# Altium PCB PCB_Reflow_Plate.PcbDoc (part 2 of 2)
Units mil, origin at the board's own origin, x right, y up, seen from the top; angles counter-clockwise.
Board outline 3822.83 x 3712.6 mil, 2 copper layers (Top Layer, Bottom Layer); 42 components, 17 nets, 157 pads, 47 vias.
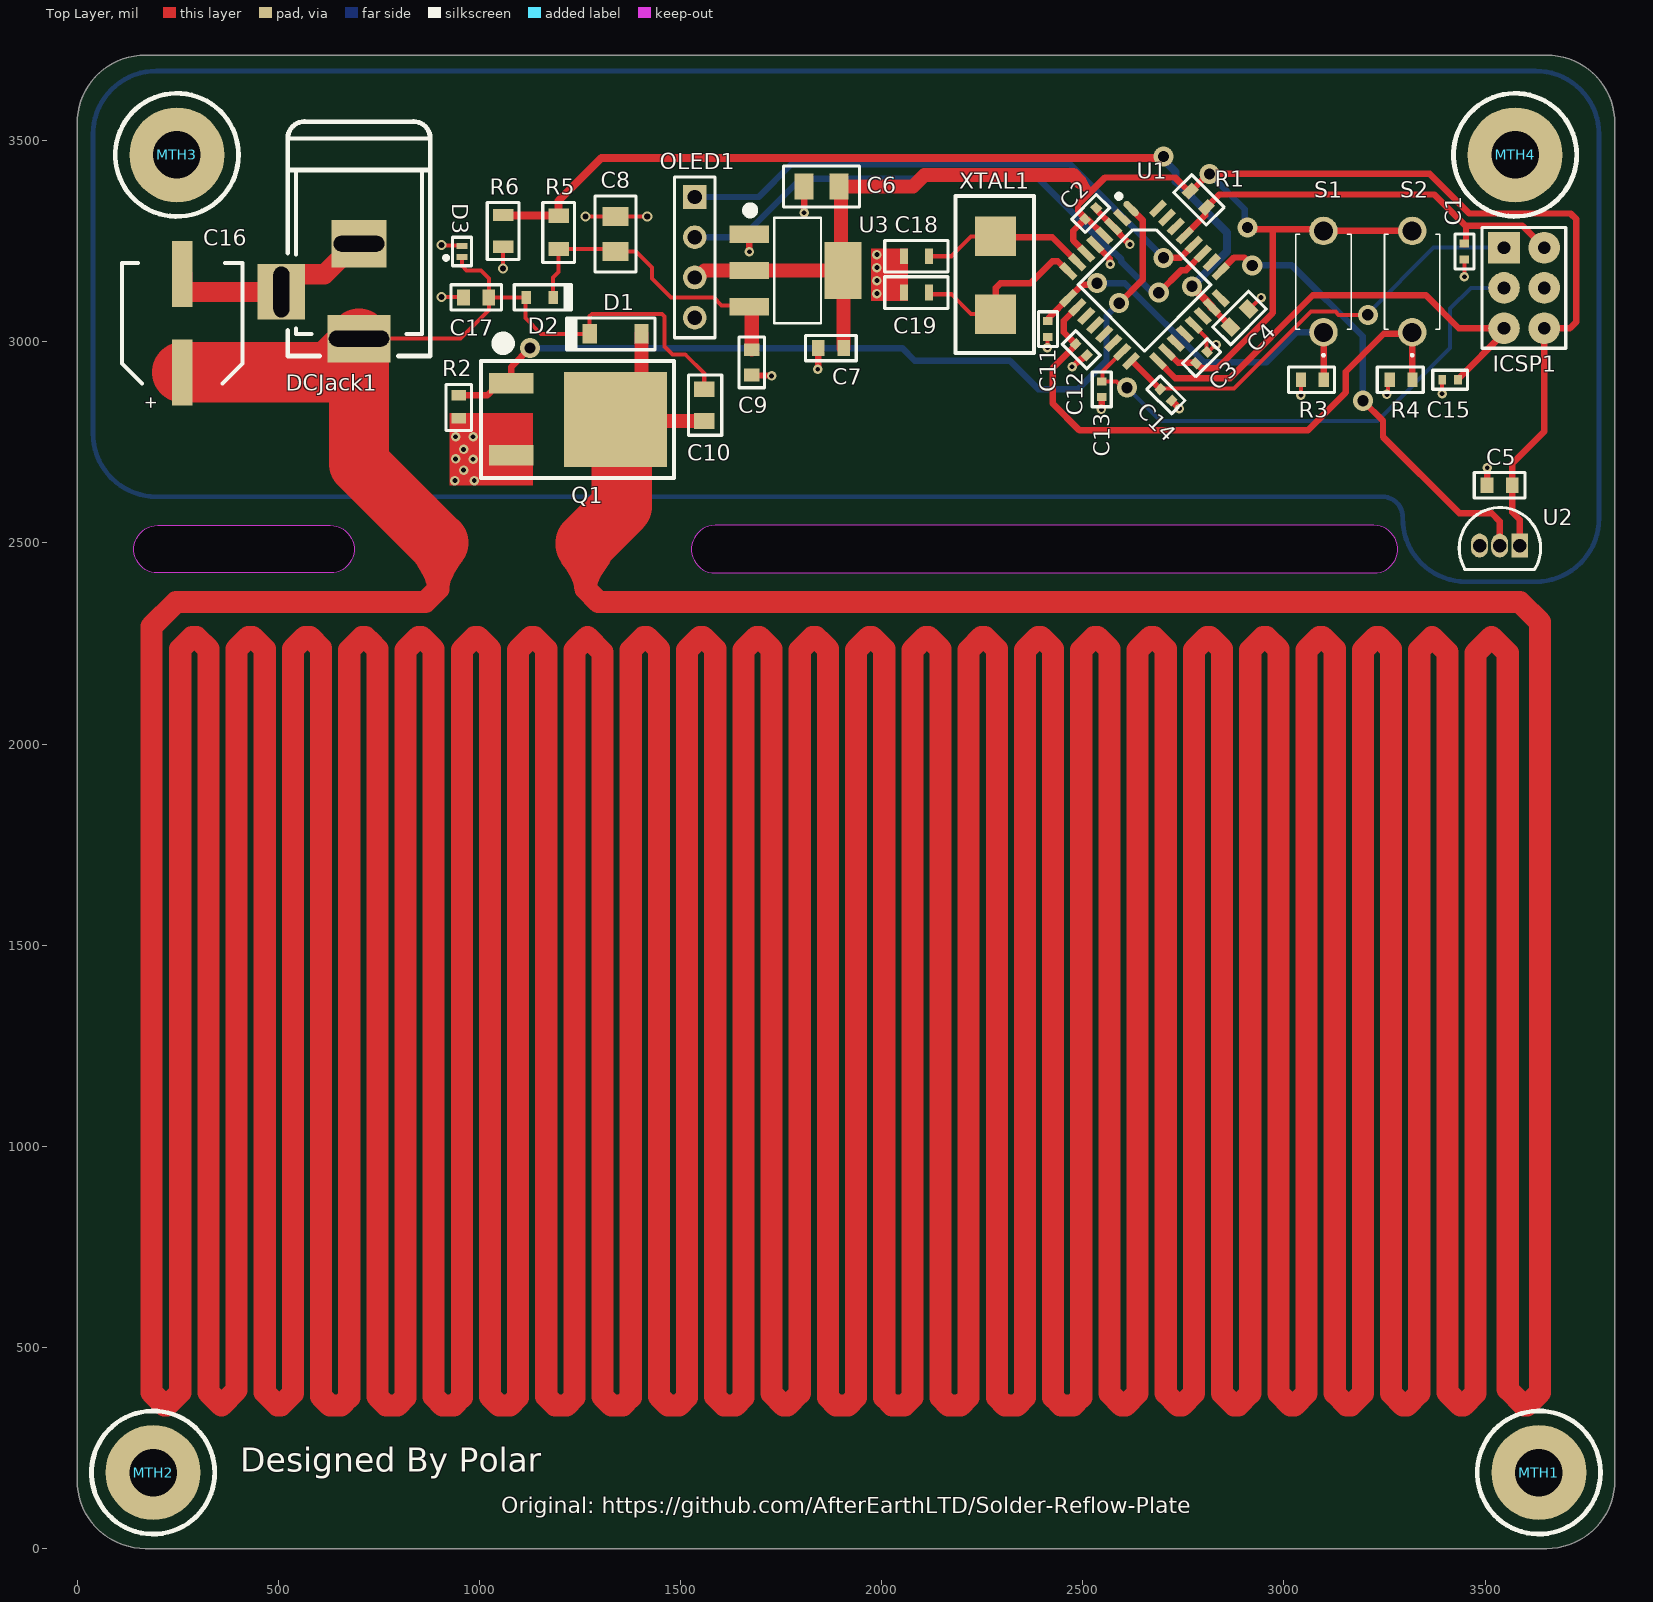
[diagram p0: Top Layer view]

## Via types
v1: diameter 23.62, hole 11.81, Top Layer to Bottom Layer, tented both sides, 29 vias
v2: diameter 50, hole 28, Top Layer to Bottom Layer, tented both sides, 13 vias
v3: diameter 25, hole 15, Top Layer to Bottom Layer, tented both sides, 5 vias

## Nets (pads, with @x,y where several pads share a name; then routed paths per layer and width w, separated by ;. In a path a pad name is that pad's centre, name@x,y a point inside that pad or via, vN(x,y) a via of type N, cw(c..) or ccw(c..) an arc to the next point about the centre after c; other vN are vias at no path point) (continued)
Mos_Drain: (continued)
  Top Layer w55: 897.64,2500 897.64,2385.6 865.42,2353.39 246.38,2353.39 185.04,2292.05 185.04,2245.95 185.04,388.17 217.26,355.95 224.16,355.95 256.38,388.17 256.38,2235.95 286.38,2265.95 296.38,2265.95 326.38,2235.95 326.38,388.17 358.6,355.95 396.38,393.73 396.38,2235.95 426.38,2265.95 436.38,2265.95 466.38,2235.95 466.38,388.17 498.6,355.95 506.38,355.95 536.38,385.95 536.38,2235.95 566.38,2265.95 578.6,2265.95 606.38,2238.17 606.38,378.17 628.6,355.95 656.38,355.95 676.38,375.95 676.38,2233.73 708.6,2265.95 716.38,2265.95 730.27,2252.06 746.38,2235.95 746.38,378.17 768.6,355.95 796.38,355.95 816.38,375.95 816.38,2233.73 848.6,2265.95 856.38,2265.95 870.27,2252.06 886.38,2235.95 886.38,378.17 908.6,355.95 936.38,355.95 956.38,375.95 956.38,2233.73 988.6,2265.95 996.38,2265.95 1010.27,2252.06 1026.38,2235.95 1026.38,378.17 1048.6,355.95 1076.38,355.95 1096.38,375.95 1096.38,2233.73 1128.6,2265.95 1136.38,2265.95 1166.38,2235.95 1166.38,378.17 1188.6,355.95 1216.38,355.95 1236.38,375.95 1236.38,2233.73 1268.6,2265.95 1306.38,2228.17 1306.38,378.17 1328.6,355.95 1356.38,355.95 1376.38,375.95 1376.38,2233.73 1408.6,2265.95 1416.38,2265.95 1446.38,2235.95 1446.38,378.17 1468.6,355.95 1496.38,355.95 1516.38,375.95 1516.38,2233.73 1548.6,2265.95 1556.38,2265.95 1586.38,2235.95 1586.38,378.17 1608.6,355.95 1636.38,355.95 1656.38,375.95 1656.38,2233.73 1688.6,2265.95 1696.38,2265.95 1726.38,2235.95 1726.38,385.95 1756.38,355.95 1766.38,355.95 1796.38,385.95 1796.38,2233.73 1828.6,2265.95 1836.38,2265.95 1850.27,2252.06 1866.38,2235.95 1866.38,375.95 1886.38,355.95 1916.38,355.95 1936.38,375.95 1936.38,2233.73 1968.6,2265.95 1976.38,2265.95 1990.27,2252.06 2006.38,2235.95 2006.38,375.95 2026.38,355.95 2056.38,355.95 2076.38,375.95 2076.38,2233.73 2108.6,2265.95 2116.38,2265.95 2146.38,2235.95 2146.38,375.95 2166.38,355.95 2196.38,355.95 2216.38,375.95 2216.38,2233.73 2248.6,2265.95 2256.38,2265.95 2270.27,2252.06 2286.38,2235.95 2286.38,375.95 2306.38,355.95 2336.38,355.95 2356.38,375.95 2356.38,2233.73 2388.6,2265.95 2396.38,2265.95 2410.27,2252.06 2426.38,2235.95 2426.38,375.95 2446.38,355.95 2476.38,355.95 2496.38,375.95 2496.38,2233.73 2528.6,2265.95 2536.38,2265.95 2550.27,2252.06 2566.38,2235.95 2566.38,385.95 2596.38,355.95 2606.38,355.95 2636.38,385.95 2636.38,2233.73 2668.6,2265.95 2676.38,2265.95 2690.27,2252.06 2706.38,2235.95 2706.38,385.95 2736.38,355.95 2746.38,355.95 2776.38,385.95 2776.38,2233.73 2808.6,2265.95 2816.38,2265.95 2846.38,2235.95 2846.38,385.95 2876.38,355.95 2886.38,355.95 2916.38,385.95 2916.38,2233.73 2948.6,2265.95 2956.38,2265.95 2986.38,2235.95 2986.38,385.95 3016.38,355.95 3026.38,355.95 3056.38,385.95 3056.38,2233.73 3088.6,2265.95 3096.38,2265.95 3110.27,2252.06 3126.38,2235.95 3126.38,385.95 3156.38,355.95 3166.38,355.95 3196.38,385.95 3196.38,2233.73 3228.6,2265.95 3236.38,2265.95 3250.27,2252.06 3266.38,2235.95 3266.38,385.95 3296.38,355.95 3306.38,355.95 3336.38,385.95 3336.38,2233.73 3368.6,2265.95 3406.38,2228.17 3406.38,388.17 3438.6,355.95 3446.38,355.95 3476.38,385.95 3476.38,2225.95 3516.38,2265.95 3556.38,2225.95 3556.38,395.95 3596.38,355.95 3604.16,355.95 3636.38,388.17 3636.38,2265.95 3636.38,2303.39 3586.38,2353.39 1296.38,2353.39 1263.78,2385.98 1263.78,2496.06
  Top Layer w150: C16.1 629.03,2923.91 DCJack1.P1@700.79,2995.67 ; DCJack1.P1 DCJack1.P1@700.79,2995.67 ; 897.64,2500 700.79,2696.85 DCJack1.P1@700.79,2995.67 ; 1263.78,2496.06 1263.78,2500 1354.33,2590.55 1354.33,2791.02 1342.2,2803.15 Q1.1
  Bottom Layer w50: DCJack1.P1 712.6,2996.06 DCJack1.P1@712.6,2984.25
Mos_Gate: Q1.3 R2.2 U1.1@2620.14,3331.04 | length 2182.4
  Top Layer w16: R2.2 1020.09,2867.13 1049.53,2896.57 Q1.3 1079.06,2937.32 v2(1125.98,2984.25) ; v2(2590.55,3096.06) 2649.61,3155.11 2649.61,3301.57 U1.1@2620.14,3331.04
  Bottom Layer w16: v2(1125.98,2984.25) 2051.18,2984.25 2082.68,2952.76 2318.9,2952.76 2389.76,2881.89 2488.19,2881.89 2559.06,2952.76 2559.06,3064.56 v2(2590.55,3096.06)
MOSI: C13.1 ICSP1.2 U1.15@2597.87,2974.7 | length 1329.5
  Top Layer w10: U1.15@2597.87,2974.7 2549.58,2926.42 2549.58,2903.91 C13.1 2583.66,2901.57 2599.41,2885.83 v2(2610.24,2885.83)
  Bottom Layer w10: v2(2610.24,2885.83) 2692.91,2803.15 3232.28,2803.15 3413.39,2984.25 3413.39,3082.68 3464.57,3133.86 ICSP1.2
OLEDSCK: OLED1.2 U1.27@2798.31,3219.68 | length 1484.1
  Top Layer w16: v2(2688.98,3122.05) 2745.22,3178.3 2756.92,3178.3 U1.27@2798.31,3219.68
  Bottom Layer w16: OLED1.2 1653.54,3259.84 1799.21,3405.51 2389.76,3405.51 2574.56,3220.72 2579.8,3220.72 2596.09,3204.43 2596.09,3199.19 2666.72,3128.55 2682.47,3128.55 v2(2688.98,3122.05)
OLEDSDA: OLED1.1 U1.28@2776.03,3241.95 | length 1384.2
  Top Layer w16: v2(2700.79,3208.66) 2742.74,3208.66 U1.28@2776.03,3241.95
  Bottom Layer w16: OLED1.1 1694.49,3359.84 1775.59,3440.94 2468.5,3440.94 v2(2700.79,3208.66)
Reset: C1.2 ICSP1.6 R1.1 U1.29@2753.76,3264.22 | length 1067.1
  Top Layer w16: U1.29@2753.76,3264.22 2804.1,3314.56 2804.1,3330.67 R1.1 2839.58,3366.14 3374.02,3366.14 3452.63,3287.53 ; C1.2 C1.2@3450.79,3244.09 ; C1.2@3448.94,3242.25 C1.2@3450.79,3244.09 ; ICSP1.6@3635.24,3245.86 ICSP1.6 3647.24,3234.52 3593.03,3288.73 3453.83,3288.73 3452.63,3287.53 ; C1.2@3450.79,3244.09 3452.63,3245.94 3452.63,3287.53
SCK: C15.2 ICSP1.3 U1.17@2686.95,2952.43 | length 1172.7
  Top Layer w16: U1.17@2686.95,2952.43 2729.93,2909.45 2866.14,2909.45 3072,3115.3 3353.2,3115.3 3434.65,3033.86 ICSP1.3 3547.24,3021.65 3433.07,2907.48 C15.2
Temp_Out: U1.25@2842.85,3175.14 U2.2 | length 1166.5
  Top Layer w16: U1.25@2842.85,3175.14 2842.85,3176.35 2875.89,3209.4 2901.58,3209.4 v2(2921.26,3189.71) v2@2912.06,3189.71 ; v2(3196.38,2853.39) 3246.38,2803.39 3246.38,2763.39 3436.38,2573.39 3516.38,2573.39 3536.38,2553.39 U2.2
  Bottom Layer w16: v2(2921.26,3189.71) 3020.05,3189.71 3196.38,3013.39 v2(3196.38,2853.39)
UPSW: C11.2 R3.2 S1.1 U1.9@2464.24,3108.33 | length 960.1
  Top Layer w16: C11.2 2415.35,3051.18 2417.2,3053.02 2417.2,3061.28 2464.24,3108.33 2497.91,3142 2531.76,3142 v2(2535.43,3145.67) ; S1.1 3098.92,3023.13 3098.92,2906 R3.2
  Bottom Layer w16: v2(2535.43,3145.67) 2604.52,3145.67 2801.37,2948.82 2956.69,2948.82 3031.5,3023.62 S1.1
Vcc_Div: C4.1 R5.1 R6.2 U1.23@2820.58,3086.05 | length 2303.3
  Top Layer w16: U1.23@2820.58,3084.88 2871.43,3034.02 C4.1@2871.43,3032.85
  Top Layer w20: R6.2 1060.04,3313.98 1195.87,3313.98 R5.1 1196.85,3350.39 1303.15,3456.69 2696.85,3456.69 v2(2700.79,3460.63) ; v2(2771.65,3137.8) 2810.14,3099.31 2810.14,3098.11 2820.58,3087.67 2820.58,3086.05 U1.23@2820.58,3084.88 ; C4.1@2871.43,3032.85 2872.58,3034 C4.1@2878.41,3034
  Bottom Layer w20: v2(2700.79,3460.63) 2700.79,3452.51 2731,3422.3 2731,3398.92 2858.27,3271.65 2858.27,3224.41 v2(2771.65,3137.8)
Vin: C8.1 C9.2 D2.K R5.2 U3.3@1670.47,3086.61 | length 785.6
  Top Layer w10: D2.K 1183.07,3159.45 1196.85,3173.23 R5.2 1332.68,3230.31 C8.1 1389.76,3224.41 1429.13,3185.04 1429.13,3157.48 1476.38,3110.24 1582.68,3110.24 1602.36,3090.55 1669.08,3090.55 U3.3@1677.17,3082.46
  Top Layer w35: C9.2 U3.3@1677.17,3082.46
XTAL_IN: C18.2 U1.7@2486.51,3197.41 XTAL1.1 | length 415.5
  Top Layer w10: C18.2 2173.23,3212.6 2222.44,3261.81 XTAL1.1
  Top Layer w16: XTAL1.1 2285.43,3259.84 2424.08,3259.84 U1.7@2486.51,3197.41
XTAL_OUT: C19.2 U1.8@2464.24,3175.14 XTAL1.2 | length 471
  Top Layer w10: C19.2 2122.05,3118.11 2173.23,3118.11 2222.44,3068.9 XTAL1.2
  Top Layer w16: XTAL1.2 2283.46,3133.86 2295.28,3145.67 2370.08,3145.67 2424.66,3200.25 2437.91,3200.25 2463.02,3175.14 U1.8@2464.24,3175.14
pads on no net: MTH1.1 MTH2.1 U1.1@2620.14,3331.04 U1.2 U1.3@2575.59,3286.49 U1.4@2553.32,3264.22 U1.5@2531.05,3241.95 U1.6@2508.78,3219.68 U1.7@2486.51,3197.41 U1.8@2464.24,3175.14 U1.9@2464.24,3108.33 U1.10@2486.51,3086.05 U1.11 U1.12 U1.13 U1.14 U1.15@2597.87,2974.7 U1.16@2620.14,2952.43 U1.17@2686.95,2952.43 U1.18@2709.22,2974.7 U1.19 U1.20 U1.21@2776.03,3041.51 U1.22 U1.23@2820.58,3086.05 U1.24 U1.25@2842.85,3175.14 U1.26 U1.27@2798.31,3219.68 U1.28@2776.03,3241.95 U1.29@2753.76,3264.22 U1.30 U1.31 U1.32 U3.1@1670.47,3267.72 U3.2@1670.47,3177.17 U3.3@1670.47,3086.61 U3.4@1904.33,3177.17
copper on no net: | length 9670.4
  Bottom Layer w11.81: 3244.09,2614.98 cw(c3244.09,2563.73) 3295.28,2561.03 ccw(c3452.76,2561.03) 3452.76,2403.55 3625.98,2403.55 ccw(c3625.98,2561.03) 3783.47,2561.03 3783.47,3515.75 ccw(c3625.98,3515.75) 3625.98,3673.23 196.85,3673.23 ccw(c196.85,3515.75) 39.37,3515.75 39.37,2772.39 ccw(c196.85,2772.39) 196.85,2614.91 3225.65,2614.91 3246.8,2614.91

## Polygon pours and split planes (outlines as drawn)
GND on Bottom Layer "GND_L02_P000" (solid, remove dead copper, pour order 0): 196.85,2614.91 cw(c196.85,2772.39) 39.37,2772.39 39.37,3515.75 cw(c196.85,3515.75) 196.85,3673.23 3625.98,3673.23 cw(c3625.98,3515.75) 3783.47,3515.75 3783.47,2561.03 cw(c3625.98,2561.03) 3625.98,2403.55 3452.76,2403.55 cw(c3452.76,2561.03) 3295.28,2561.03 ccw(c3244.09,2563.73) 3244.09,2614.98 3246.8,2614.91

## Other copper
Top Layer:
  rectangle net GND: 1973.28,3101.91 2064.96,3232.28
  rectangle net GND: 960.63,2642.47 1133.86,2822.83
  rectangle net GND: 925.2,2642.47 966.54,2822.83

## Silkscreen, mask and mechanical layers (free items; w line width, h text height)
Top Overlay:
  text "Designed By Polar" at 405.16,191.01 h60
  text "Original: https://github.com/AfterEarthLTD/Solder-Reflow-Plate" at 1054.04,87.67 h40
Board:
  lines w11.81: 3219.99,2425.2 1586.14,2425.2 cw(c1586.14,2484.25) 1586.14,2543.31 3219.99,2543.31 ; 3223.93,2425.2 ccw(c3223.93,2484.25) 3223.93,2543.31 ; 0,169.29 ccw(c169.29,169.29) 169.29,0 3653.54,0 ccw(c3653.54,169.29) 3822.83,169.29 3822.83,3543.31 ccw(c3653.54,3543.31) 3653.54,3712.6 169.29,3712.6 ccw(c169.29,3543.31) 0,3543.31 0,169.29 ; 200.31,2425.2 cw(c200.31,2484.25) 200.31,2543.31 629.44,2543.31 cw(c629.44,2484.25) 629.44,2425.2 200.31,2425.2

## Text inside footprints (layer, text, board x,y; h text height)
C16: Top Assembly "+" at 197.27,2830.87 h30 r90; Top Overlay "+" at 197.27,2830.87 h30 r90